# EAGLE board Backplate (EAGLE 9.6.2)
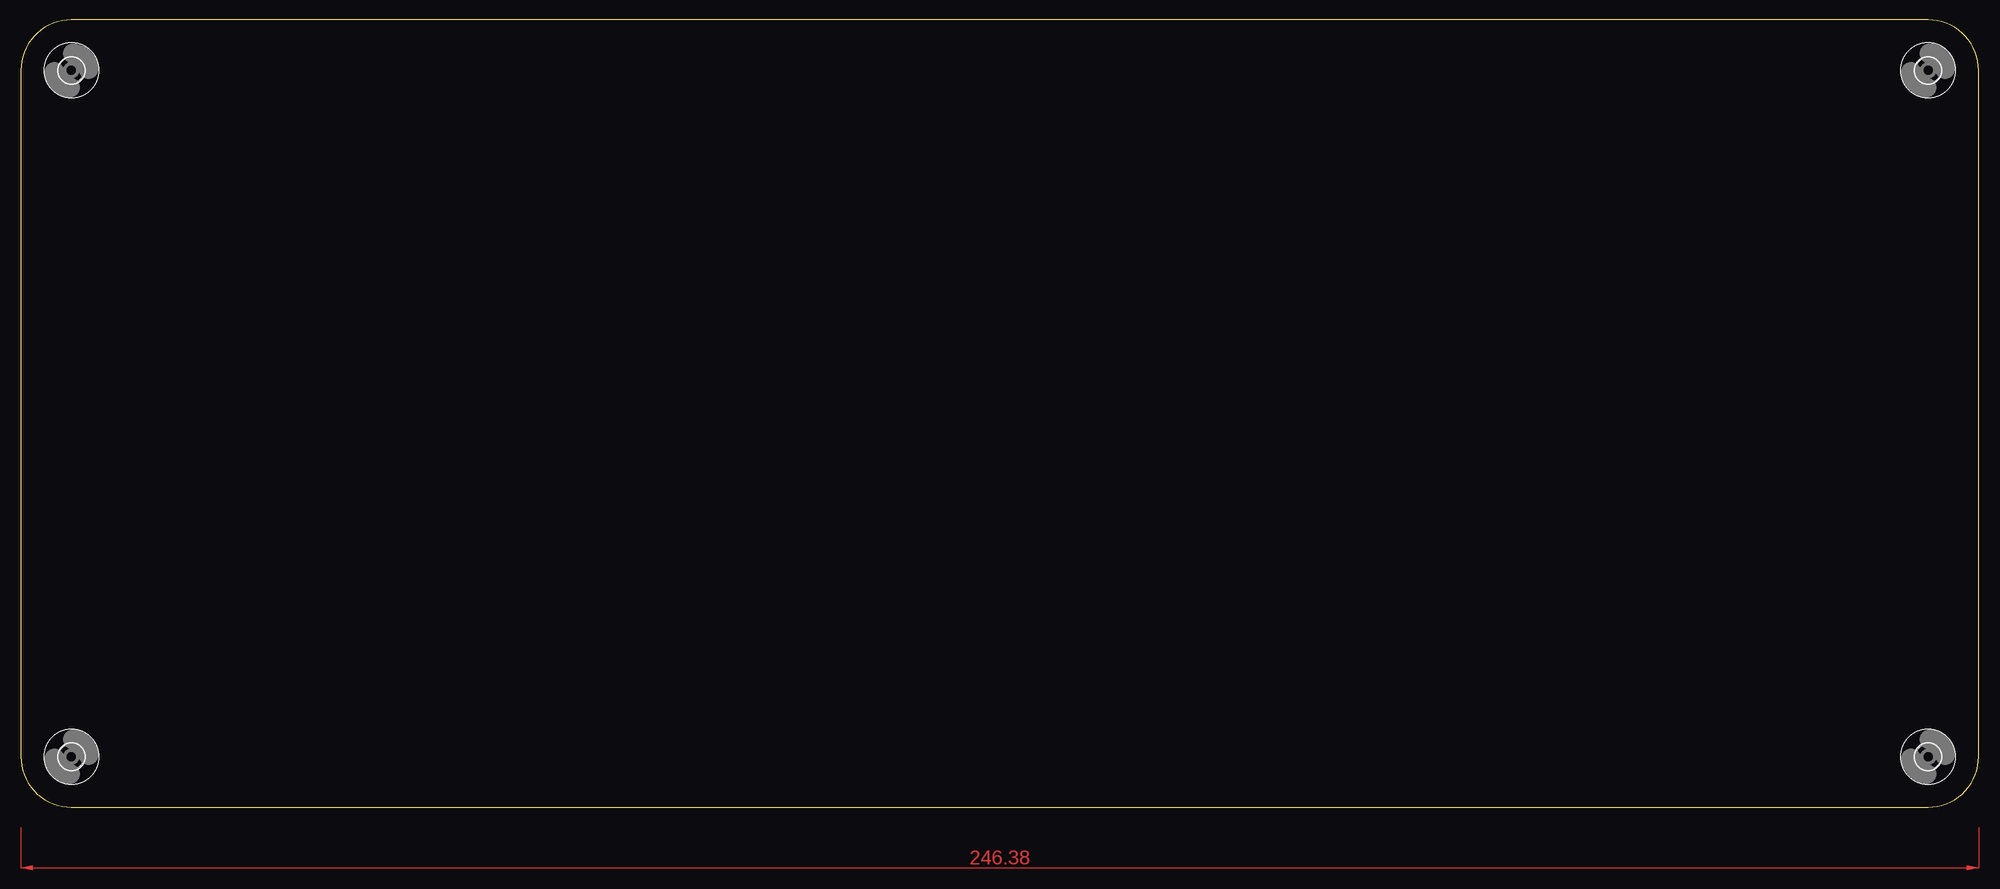
[diagram p0: board, top side]
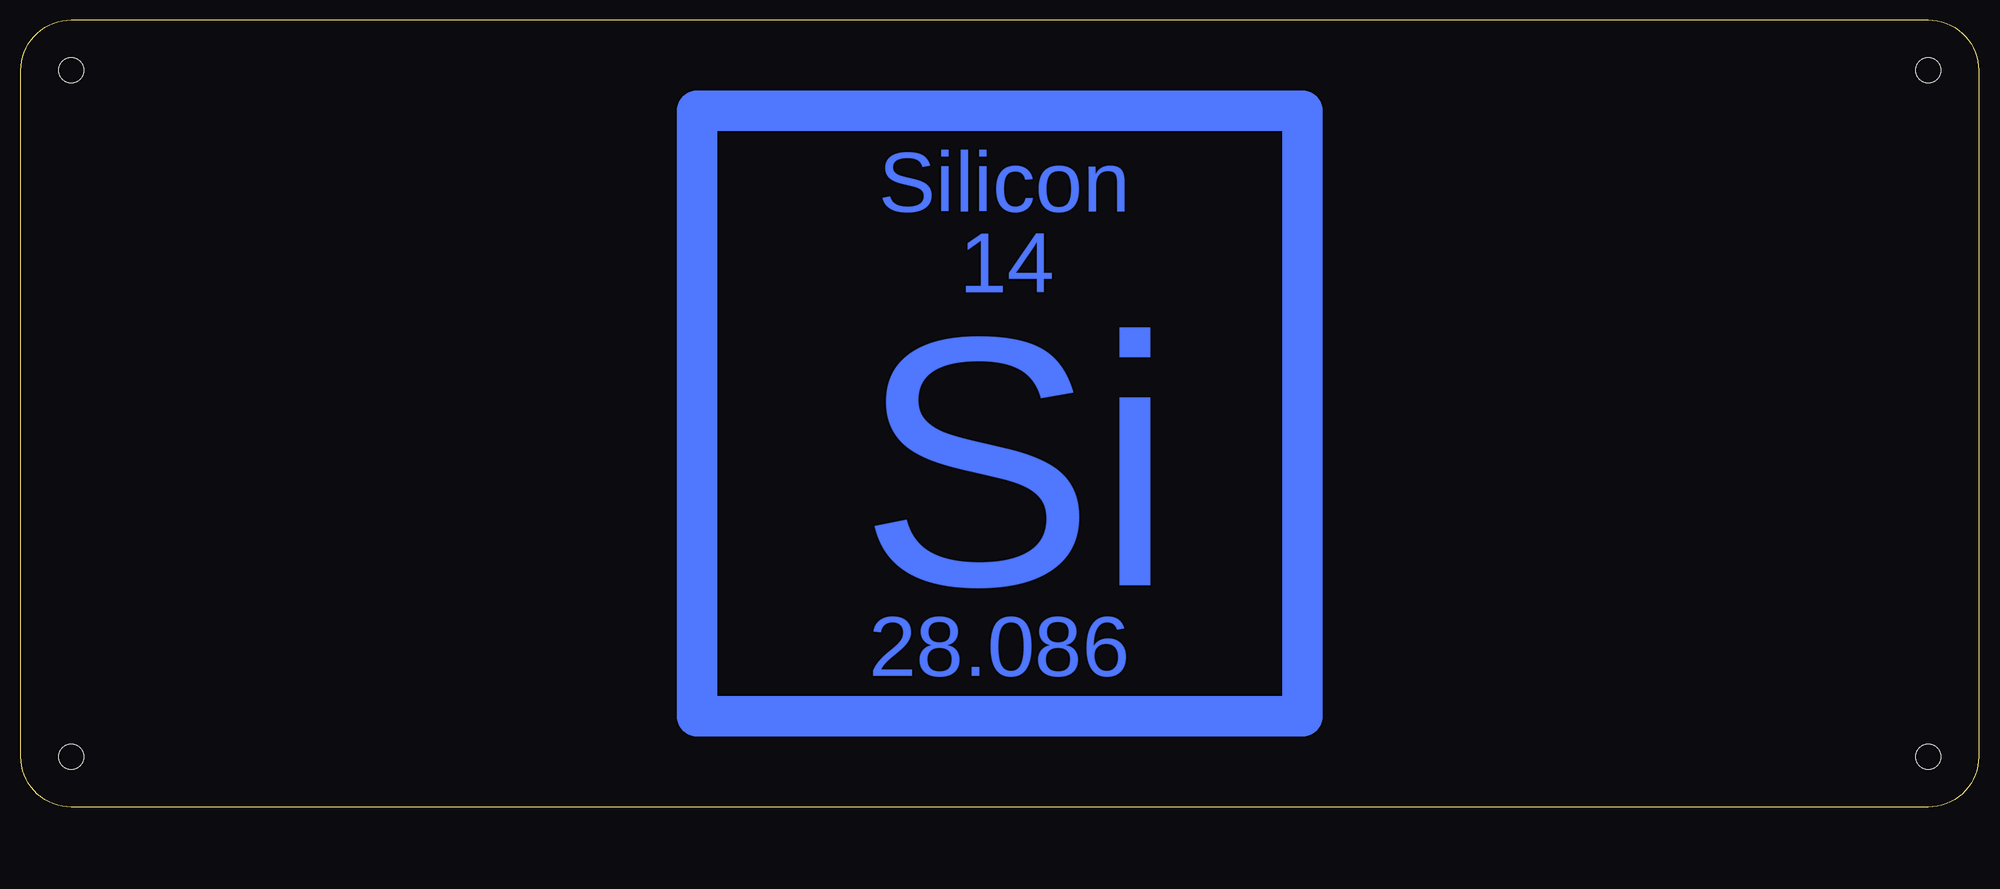
[diagram p1: board, bottom side, seen from below]

Size 246.38 x 99.06 mm. Coordinates in mm from the lower left corner, seen from the top.
Outline: 6.35,0 240.03,0 arc90 246.38,6.35 246.38,92.71 arc90 240.03,99.06 6.35,99.06 arc90 0,92.71 0,6.35 arc90 6.35,0
Copper layers (1*16): Top 0.035mm / dielectric 1.53mm / Bottom 0.035mm
Design rules "jlcpcb-2-layer(MINE)": minimum track width 5mil, minimum drill 0.2mm, track to track 5mil, track to pad 5mil, pad to pad 5mil, via to via 10mil, smd to smd 0mil, copper to edge 5mil, drill to drill 0.54mm, minimum pad ring 4mil, minimum via ring 4mil, stop-mask expansion 3mil, vias tented up to drill 100mil, thermal gap 10mil

## Footprints (pad centres in the part's own frame; a part is rotated, then mirrored left to right if it is on the bottom)
3,2 = hole 3.2: 0,0

## Placement (x,y rotation side)
H1  MOUNT-HOLE3.2  [3,2]  6.35,6.35 0 top
H2  MOUNT-HOLE3.2  [3,2]  6.35,92.71 0 top
H3  MOUNT-HOLE3.2  [3,2]  240.03,92.71 0 top
H4  MOUNT-HOLE3.2  [3,2]  240.03,6.35 0 top

## Library data of the parts
H1-H4 = holes

## Tracks (layer width: path | path; a pad name or v marks a point on that pad's centre or on a via)
S$1
  Bottom 5.08: 161.29,87.63 85.09,87.63
S$2
  Bottom 5.08: 85.09,87.63 85.09,11.43
S$3
  Bottom 5.08: 161.29,11.43 161.29,87.63
S$4
  Bottom 5.08: 85.09,11.43 161.29,11.43
(copper drawn outside any net)
  shapes: Top area x2

## Text on the board
Bottom: Silicon | 14 | Si | 28.086